# Altium PCB Misko 3.PcbDoc (part 4 of 4)
Units mm, origin at the board's own origin, x right, y up, seen from the top; angles counter-clockwise.
Board outline 128.1 x 53.3 mm, 6 copper layers (Top (LS), Mid 1 (LS), Mid 2 (GND), Mid 3 (P/HS), Mid 4 (GND), Bottom (HS)), stack 1.597 mm thick; 230 components, 214 nets, 896 pads, 500 vias.
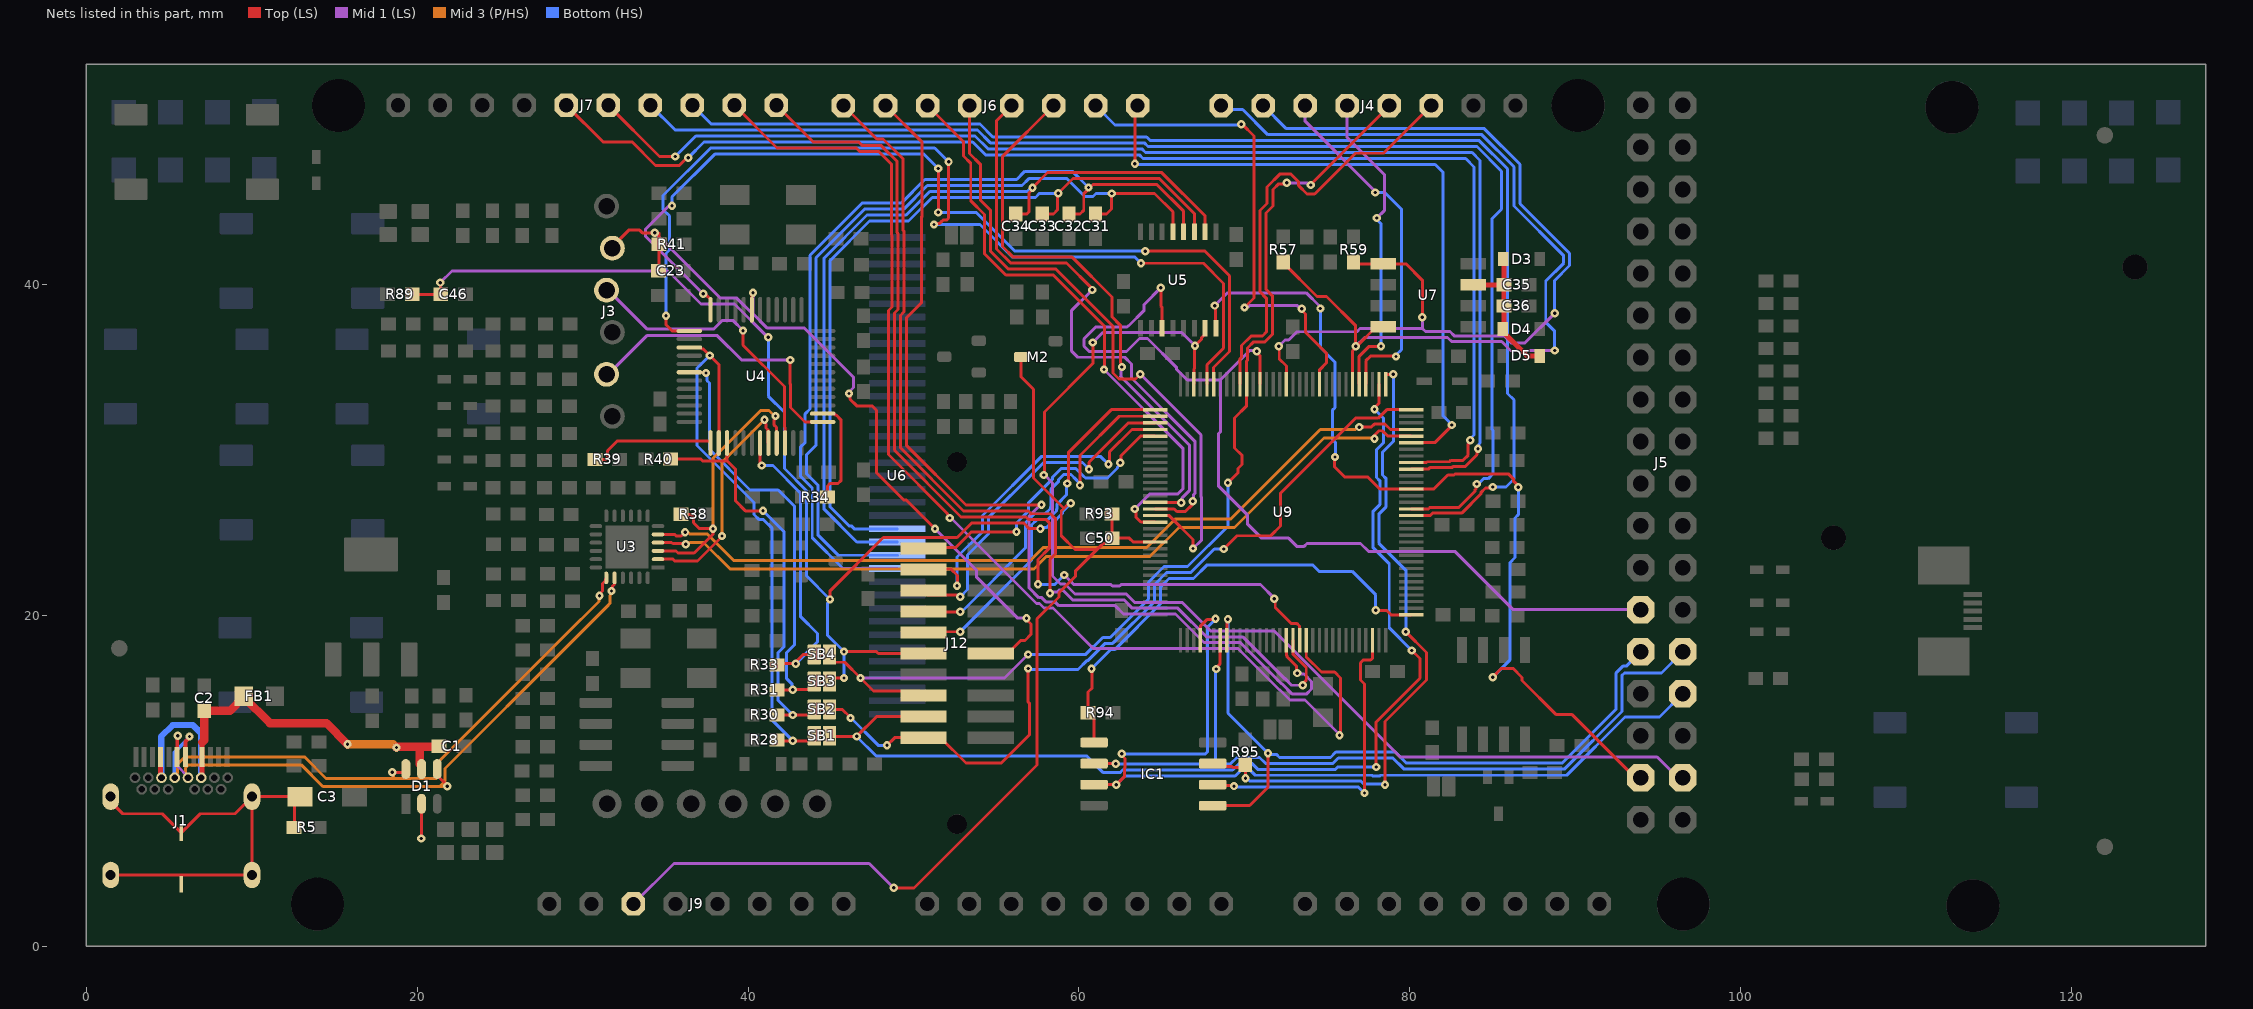
[diagram p8: the nets of this part, all layers, seen from the top]

## Via types
v1: diameter 0.5, hole 0.2, Top (LS) to Bottom (HS), tented both sides, 500 vias

## Nets (pads, with @x,y where several pads share a name; then routed paths per layer and width w, separated by ;. In a path a pad name is that pad's centre, name@x,y a point inside that pad or via, vN(x,y) a via of type N, cw(c..) or ccw(c..) an arc to the next point about the centre after c; other vN are vias at no path point) (continued)
NRST: C46.2 C50.2 J9.3 J12.10 M2.3 R31.2 R89.1 R93.2 SB3.1 SB3.2 U4.18 U9.21 | length 161
  Top (LS) w0.18: R89.1@19.702,39.393 C46.2@21.429,39.393 21.4,39.422 v1(21.4,40.1) ; R31.2@41.739,15.48 41.749,15.49 v1(42.7,15.49) 42.716,15.507 43.695,15.507 43.805,15.617 SB3.1@43.805,15.993 ; SB3.1@44.005,15.993 SB3.2@44.925,15.993 ; v1(44.958,20.955) 44.965,20.962 44.965,21.479 48.176,24.69 52.638,24.69 53.53,25.582 56.649,25.582 57,25.23 v1(57.668,25.23) ; SB3.2@45.125,16.09 45.235,16.2 v1(45.8,16.2) ; v1(45.8,17.8) 47.75,17.8 47.87,17.68 J12.10@50.6,17.68 ; v1(48.8,3.52) 50.034,3.52 57.465,10.951 57.465,19.778 58.793,21.105 58.793,21.352 59.779,22.338 59.779,22.655 61.468,24.345 61.697,24.345 C50.2@62.007,24.655 ; M2.3@56.494,35.602 56.494,34.409 57.25,33.653 57.25,28.294 59.089,26.455 ; v1(59.502,26.762) 59.415,26.762 59.281,26.628 59.261,26.628 59.089,26.455 ; 61.077,23.965 59.759,23.965 58.928,24.795 58.928,26.295 59.089,26.455 ; R93.2@61.987,26.123 61.987,24.675 C50.2@62.007,24.655 ; U9.21@64.598,24.423 63.275,24.423 63.043,24.655 C50.2@62.007,24.655
  Top (LS) w0.2: U4.18@36.456,34.682 36.466,34.673 37.423,34.673 v1(37.46,34.636)
  Mid 1 (LS) w0.18: v1(21.4,40.1) 22.105,40.805 35.159,40.805 37.153,38.81 39.178,38.81 41.194,36.795 v1(41.222,36.795) ; J9.3@33.074,2.554 35.521,5 47.32,5 v1(48.8,3.52)
  Bottom (HS) w0.18: v1(37.46,34.636) 37.521,34.575 37.521,34.171 37.666,34.026 37.666,30.023 40.123,27.566 41.819,27.566 42.8,26.585 42.8,18.211 42.335,17.746 42.335,16.165 42.667,15.833 42.667,15.523 v1(42.7,15.49) ; v1(41.222,36.795) 41.222,33.238 42.2,32.26 42.2,28.859 43.52,27.538 43.52,22.393 v1(44.958,20.955) ; v1@44.958,20.868 44.79,20.7 44.79,18.81 v1(45.8,17.8) v1(45.8,16.2) ; v1(57.668,25.23) 57.729,25.292 58.031,25.292 58.15,25.41 58.256,25.41 58.994,26.148 58.994,26.255 v1(59.502,26.762)
PWM2: J6.3 U9.15 | length 33.7
  Top (LS) w0.18: J6.3@58.466,50.8 55.369,47.703 55.369,42.677 55.38,42.667 55.38,42.284 56.024,41.64 59.587,41.64 61.997,39.229 61.997,38.031 62.5,37.528 62.5,35.26 62.533,35.228 62.533,35.056 v1(62.594,34.995) ; U9.15@64.598,26.823 v1@65.955,26.823
  Mid 1 (LS) w0.18: v1(62.594,34.995) 62.548,34.949 62.548,34.475 62.513,34.44 66.669,30.284 66.669,27.526 66.239,27.096 66.239,26.861 v1(66.178,26.8)
PWM3: J6.4 U9.16 | length 36.7
  Top (LS) w0.18: J6.4@55.926,50.8 55.009,49.883 55.009,43.538 55.009,42.528 55.02,42.517 55.02,42.135 55.875,41.28 56.758,41.28 59.243,41.28 60.794,39.729 v1(60.794,39.66) ; U9.16@64.598,26.423 65.753,26.423 65.916,26.26 66.424,26.26 66.839,26.675 66.839,26.856 v1(66.872,26.89)
  Mid 1 (LS) w0.18: v1(60.794,39.66) 59.562,38.427 59.562,35.954 59.926,35.589 62.763,35.589 63.171,35.182 63.171,34.338 67.019,30.489 67.019,27.381 66.933,27.295 66.933,26.951 v1(66.872,26.89)
PWM4: J6.5 U9.17 | length 39.1
  Top (LS) w0.18: J6.5@53.386,50.8 53.386,47.903 54.034,47.254 54.034,45.09 54.649,44.475 54.649,43.389 54.649,42.379 54.66,42.368 54.66,41.986 55.726,40.92 56.609,40.92 58.599,40.92 62.054,37.465 62.054,34.643 62.423,34.273 63.422,34.273 v1(63.711,34.561) ; U9.17@64.598,26.023 64.608,26.013 65.455,26.013 66.889,24.579 v1(66.889,24.025)
  Mid 1 (LS) w0.18: v1(63.711,34.561) 67.369,30.903 67.369,27.156 67.406,27.12 67.406,27.102 67.412,27.096 67.412,24.549 v1(66.889,24.025)
PWM5: J6.6 U9.18 | length 36.5
  Top (LS) w0.18: J6.6@50.846,50.8 53.026,48.62 53.026,47.754 53.459,47.321 53.459,45.041 54.289,44.211 54.289,43.24 54.289,42.23 54.3,42.219 54.3,41.836 55.576,40.56 56.46,40.56 58.45,40.56 61.54,37.47 61.54,34.877 v1(61.514,34.851) ; v1(63.373,26.416) 63.434,26.355 63.434,25.939 63.74,25.633 64.588,25.633 U9.18@64.598,25.623
  Mid 1 (LS) w0.18: v1(61.514,34.851) 66.3,30.065 66.3,28.099 66.3,27.651 65.984,27.335 64.292,27.335 v1(63.373,26.416)
PWM6: J6.7 U9.49 | length 60.5
  Top (LS) w0.18: J6.7@48.306,50.8 50.498,48.608 50.498,44.08 50.47,44.052 50.47,38.872 49.566,37.968 49.566,30.269 53.173,26.662 57.726,26.662 v1(57.734,26.67) ; U9.49@72.536,18.485 72.546,18.475 72.546,17.57 72.586,17.53 72.586,17.478 73.134,16.93 73.134,16.561 v1(73.195,16.5)
  Mid 1 (LS) w0.18: v1(57.734,26.67) 57.67,26.67 56.989,25.989 56.989,21.645 57.572,21.062 57.756,21.062 58.029,20.789 58.567,20.789 58.779,20.578 62.186,20.578 62.688,20.076 65.828,20.076 67.561,18.343 69.75,18.343 72.259,15.834 72.287,15.834 72.895,15.226 73.74,15.226 74.056,15.542 74.056,15.99 73.607,16.439 73.256,16.439 v1(73.195,16.5)
PWM7: J6.8 U9.50 | length 59.2
  Top (LS) w0.18: J6.8@45.766,50.8 47.785,48.781 48.161,48.781 49.375,47.567 49.375,43.265 49.415,43.225 49.415,38.326 49.206,38.117 49.206,30.12 53.024,26.302 56.947,26.302 57.119,26.13 58.28,26.13 58.568,25.843 58.568,23.692 58.253,23.377 v1(58.253,21.329) ; U9.50@72.936,18.485 72.946,18.475 72.946,17.679 72.946,17.627 73.735,16.838 73.735,16.072 73.516,15.853 v1(73.516,15.766)
  Mid 1 (LS) w0.18: v1(58.253,21.329) 58.314,21.39 58.677,21.39 58.824,21.537 59.004,21.537 59.614,20.928 62.714,20.928 63.216,20.426 65.973,20.426 67.706,18.693 69.895,18.693 72.404,16.184 72.432,16.184 72.85,15.766 v1(73.516,15.766)
PWM8: J7.1 U9.51 | length 60
  Top (LS) w0.18: J7.1@41.714,50.82 43.934,48.6 46.692,48.6 46.915,48.376 48.057,48.376 49.015,47.418 49.015,43.116 49.055,43.076 49.055,38.475 48.846,38.266 48.846,29.971 52.875,25.942 56.798,25.942 56.969,25.77 58.024,25.77 58.208,25.586 58.208,24.042 57.529,23.362 v1(57.529,21.869) ; v1(71.8,20.988) 71.861,20.927 71.861,20.464 72.813,19.513 73.156,19.513 73.326,19.343 73.326,18.495 U9.51@73.336,18.485
  Mid 1 (LS) w0.18: v1(59.105,22.427) 59.676,21.856 61.929,21.856 62.012,21.772 62.459,21.772 62.543,21.856 70.973,21.856 71.8,21.029 v1(71.8,20.988)
  Bottom (HS) w0.18: v1(57.529,21.869) 58.547,21.869 v1(59.105,22.427)
PWM9: J7.2 U9.52 | length 70.1
  Top (LS) w0.18: J7.2@39.174,50.82 41.754,48.24 46.542,48.24 46.766,48.016 47.908,48.016 48.655,47.269 48.655,42.967 48.695,42.927 48.695,38.625 48.486,38.415 48.486,29.709 52.043,26.151 52.043,26.096 52.184,25.956 v1(52.184,25.869) ; U9.52@73.736,18.485 73.736,17.477 74.653,16.56 75.45,16.56 75.8,16.21 75.8,12.8 v1(75.75,12.75)
  Mid 1 (LS) w0.18: v1(52.184,25.869) 52.27,25.869 57.427,20.712 57.611,20.712 57.884,20.439 58.422,20.439 60.868,17.993 69.605,17.993 72.114,15.484 72.142,15.484 72.75,14.876 73.666,14.876 75.75,12.792 v1(75.75,12.75)
PWM10: J7.3 U9.80 | length 76.9
  Top (LS) w0.18: U9.80@80.074,26.023 81.23,26.023 81.37,26.163 83.128,26.163 84.284,27.318 84.284,27.406 84.567,27.689 84.939,27.689 v1(85,27.75)
  Bottom (HS) w0.18: J7.3@36.634,50.82 37.774,49.68 54.02,49.68 54.794,48.906 64.094,48.906 64.32,48.68 84.197,48.68 85.9,46.977 85.9,33.402 86.287,33.015 86.287,28.237 85.8,27.75 v1(85,27.75)
PWM11: J7.4 U9.81 | length 77.7
  Top (LS) w0.18: U9.81@80.074,26.423 81.121,26.423 81.221,26.523 82.97,26.523 83.924,27.476 83.924,27.555 83.996,27.627 83.996,27.882 v1(84.042,27.928)
  Bottom (HS) w0.18: J7.4@34.094,50.82 35.594,49.32 53.871,49.32 54.644,48.546 63.945,48.546 64.171,48.32 84.048,48.32 85.54,46.828 85.54,44.54 84.96,43.96 84.96,31.236 85.02,31.176 85.02,28.534 84.733,28.247 84.448,28.247 84.129,27.928 v1(84.042,27.928)
PWM12: J7.5 U9.87 | length 77.3
  Top (LS) w0.18: J7.5@31.554,50.82 34.654,47.72 v1(35.6,47.72) ; U9.87@80.074,28.823 81.115,28.823 81.205,28.913 82.536,28.913 82.623,29 83.358,29 84.059,29.701 84.059,29.997 v1(84.12,30.058)
  Bottom (HS) w0.18: v1(35.6,47.72) 36.84,48.96 53.722,48.96 54.495,48.186 63.796,48.186 64.022,47.96 83.766,47.96 84.24,47.486 84.24,30.403 84.181,30.344 84.181,30.119 v1(84.12,30.058)
PWM13: J7.6 U9.88 | length 78.8
  Top (LS) w0.18: J7.6@29.014,50.82 31.228,48.606 32.98,48.606 34.406,47.18 35.842,47.18 36.308,47.646 v1(36.382,47.646) ; U9.88@80.074,29.223 81.006,29.223 81.056,29.273 82.387,29.273 82.474,29.36 83.208,29.36 83.52,29.671 83.52,30.36 83.647,30.487 v1(83.647,30.574)
  Bottom (HS) w0.18: v1(36.382,47.646) 37.336,48.6 53.572,48.6 54.346,47.826 63.646,47.826 63.873,47.6 83.371,47.6 83.88,47.091 83.88,30.893 83.647,30.66 v1(83.647,30.574)
QSPI.CLK: IC1.6 U9.62 | length 19.3
  Top (LS) w0.18: IC1.6@68.084,9.765 68.131,9.718 69.322,9.718 v1(69.369,9.671) ; v1(77.25,9.25) 77.25,15.84 77.01,16.08 77.01,17.12 77.18,17.29 77.63,17.29 77.736,17.395 U9.62@77.736,18.485
  Bottom (HS) w0.18: v1(69.369,9.671) 69.456,9.671 69.52,9.607 76.893,9.607 v1(77.25,9.25)
QSPI.NCS: IC1.1 R94.1 U9.65 | length 29.1
  Top (LS) w0.18: v1(60.754,16.763) 60.8,16.717 60.8,15.603 60.55,15.353 R94.1@60.55,14.1 60.6,14.1 60.91,13.79 60.91,12.308 IC1.1@60.914,12.305 ; v1(77.93,20.295) 78.586,20.295 78.857,20.023 U9.65@80.074,20.023
  Bottom (HS) w0.18: v1(60.754,16.763) 61.931,17.939 62.185,17.939 64.916,20.67 64.916,21.689 65.444,22.216 66.923,22.216 67.752,23.045 74.109,23.045 74.502,22.652 76.512,22.652 77.93,21.233 v1(77.93,20.295)
QSPI_IO0: IC1.5 J5.27 U9.40 | length 43.3
  Top (LS) w0.18: IC1.5@68.084,8.495 70.313,8.495 71.423,9.604 v1(71.423,11.655) ; U9.40@68.936,18.485 68.946,18.495 68.946,19.696 v1(69,19.75)
  Bottom (HS) w0.18: v1(69,19.75) 69,14.078 v1(71.423,11.655) 71.43,11.655 71.491,11.594 71.93,11.594 72.116,11.407 75.198,11.407 75.521,11.73 79.116,11.73 79.774,11.072 89.209,11.072 92.464,14.327 92.464,16.519 92.864,16.919 93.079,16.919 J5.27@93.952,17.793
QSPI_IO1: IC1.2 J5.28 U9.39 | length 48.2
  Top (LS) w0.18: IC1.2@60.914,11.035 60.921,11.028 62.217,11.028 v1(62.223,11.021) ; v1(68.299,16.748) 68.299,16.835 68.536,17.072 U9.39@68.536,18.485
  Bottom (HS) w0.18: v1(62.223,11.021) 62.244,11 68.101,11 ; v1(68.299,16.748) 68.25,16.7 68.25,11.149 68.101,11 ; J5.28@96.492,17.793 95.209,16.51 92.964,16.51 92.824,16.37 92.824,14.178 89.358,10.712 79.625,10.712 78.967,11.37 75.67,11.37 75.347,11.047 71.267,11.047 70.907,11.407 69.547,11.407 69.14,11 68.101,11
QSPI_IO2: IC1.3 J5.30 U9.36 | length 56.1
  Top (LS) w0.18: IC1.3@60.914,9.765 60.921,9.757 62.243,9.757 v1(62.25,9.75) 62.764,10.264 62.764,10.764 62.784,10.784 62.784,11.334 62.585,11.534 v1(62.585,11.62) ; U9.36@67.336,18.485 67.336,19.333 67.753,19.75 68.21,19.75 v1(68.25,19.79)
  Mid 1 (LS) w0.18: 68,19.75 68.21,19.75 v1(68.25,19.79)
  Bottom (HS) w0.18: v1(62.25,9.75) 62.78,10.28 69.439,10.28 69.846,10.687 70.293,10.687 70.653,10.327 77.699,10.327 77.736,10.29 78.184,10.29 78.221,10.327 89.482,10.327 92.996,13.841 95.08,13.841 J5.30@96.492,15.253 ; v1(62.585,11.62) 67.653,11.62 67.759,11.726 67.759,19.259 68.25,19.75 v1(68.25,19.79)
QSPI_IO3: IC1.7 R95.2 U9.97 | length 40.1
  Top (LS) w0.18: IC1.7@68.084,11.035 68.257,10.861 69.239,10.861 69.3,10.8 R95.2@69.889,10.8 ; R95.2@70.049,10.96 R95.2@69.889,10.8 ; v1(70.069,10.147) 70.069,10.62 R95.2@69.889,10.8 ; v1(78.5,9.75) 78.5,13.578 81,16.078 81,17.75 v1(79.75,19) ; U9.97@78.536,33.961 78.536,34.544 78.546,34.554 v1(78.995,34.554)
  Bottom (HS) w0.18: v1(70.069,10.147) 70.156,10.147 70.336,9.967 77.042,9.967 77.219,9.79 78.46,9.79 v1(78.5,9.75) ; v1(78.995,34.554) 78.995,30.501 78.347,29.853 78.347,28.475 78.541,28.28 78.541,26.527 78.12,26.106 78.12,24.353 79.75,22.723 v1(79.75,19)
SCK: J5.33 U5.16 U9.84 | length 55.3
  Top (LS) w0.18: v1(68.2,38.71) 68.237,38.673 68.237,37.37 U5.16@68.275,37.332 ; v1(75.472,29.558) 75.44,29.526 75.44,28.965 76.045,28.36 77.444,28.36 78.18,27.623 U9.84@80.074,27.623 81.443,27.623 82.293,28.474 82.67,28.474 82.721,28.525 85.975,28.525 86.249,28.251 86.249,28.123 86.55,27.823 v1(86.55,27.736) ; v1(85,16.25) 85.54,16.79 86.224,16.79 86.78,16.234 86.78,16.049 88.819,14.01 89.78,14.01 91.71,12.08 92.08,11.71 93.618,10.173 J5.33@93.952,10.173
  Mid 1 (LS) w0.18: v1(68.2,38.71) 68.975,39.485 73.729,39.485 74.529,38.685 74.529,38.591 v1(74.59,38.53)
  Bottom (HS) w0.18: v1(74.59,38.53) 74.59,36.173 75.459,35.305 75.459,34.623 75.473,34.61 75.473,32.542 75.313,32.382 75.313,30.631 75.493,30.451 75.493,29.579 v1(75.472,29.558) ; v1(85,16.25) 86.061,17.311 86.061,23.191 86.35,23.48 86.35,25.873 86.55,26.072 v1(86.55,27.736)
SHLD: C3.2 D1.2 J1.Shell R5.1 | length 31.4
  Top (LS) w0.18: J1.Shell@1.48,4.3 J1.Shell@10.02,4.3 J1.Shell@10.02,8.952 ; J1.Shell@1.48,9.03 1.48,8.73 2.21,8 4.6,8 J1.Shell@5.75,6.85 6.9,8 8.99,8 9.563,8.573 9.641,8.573 J1.Shell@10.02,8.952 ; R5.1@12.569,7.173 12.6,7.204 12.6,8.711 12.828,8.939 C3.2@12.479,9.289 ; C3.2@12.919,9.03 12.66,9.289 C3.2@12.479,9.289 ; v1(20.25,6.5) 20.259,6.509 20.259,7.371 20.269,7.38 D1.2@20.269,8.603 ; J1.Shell@10.02,8.952 J1.Shell@10.02,9.03 12.259,9.03 12.479,9.25 C3.2@12.479,9.289
STM_JRST: C23.2 J3.2 J12.9 R41.2 U4.7 | length 47.8
  Top (LS) w0.18: J3.2@31.7,42.18 32.79,43.27 33.449,43.27 33.609,43.11 v1(34.355,43.11) 34.382,43.084 34.628,43.084 34.628,40.867 C23.2@34.578,40.817 ; U4.7@40.231,38.457 40.245,38.471 40.245,39.437 v1(40.296,39.488) ; v1(46.1,33.4) 46.161,33.339 46.161,33.057 46.563,32.655 47.49,32.655 47.766,32.379 47.766,28.606 49.423,26.949 49.577,26.949 v1(51.296,25.23) ; J12.9@54.665,17.68 55.692,17.68 56.481,18.468 56.732,18.468 57.105,18.841 57.105,19.464 56.834,19.735 v1(56.834,19.822)
  Mid 1 (LS) w0.18: v1(34.355,43.11) 34.381,43.11 38.331,39.16 39.323,39.16 40.268,38.215 40.296,38.215 ; v1(40.296,39.488) 40.296,38.215 ; v1(46.1,33.4) 46.1,33.487 46.38,33.766 46.38,34.382 43.416,37.346 41.165,37.346 40.296,38.215 ; v1(51.296,25.23) 53.795,22.73 53.795,22.322 56.295,19.822 v1(56.834,19.822)
STM_JTCK_5: J3.5 U4.37 | length 17.8
  Top (LS) w0.18: v1(42.547,35.424) 42.547,33.981 42.56,33.968 42.56,32.559 43.436,31.682 U4.37@44.506,31.682
  Mid 1 (LS) w0.18: J3.5@31.548,34.56 33.884,36.896 38.144,36.896 39.617,35.424 v1(42.547,35.424)
STM_JTMS_5: J3.3 U4.34 | length 17.4
  Top (LS) w0.18: v1(39.7,37.2) 39.7,36.318 42.2,33.819 42.2,31.388 42.231,31.357 U4.34@42.231,30.407
  Mid 1 (LS) w0.18: J3.3@31.548,39.64 33.88,37.307 37.944,37.307 38.459,37.822 39.077,37.822 v1(39.7,37.2)
T_JTCK: J12.4 R28.2 SB1.1 SB1.2 U4.15 U4.26 U9.98 | length 101.4
  Top (LS) w0.18: U4.15@36.456,36.182 37.125,36.182 37.21,36.097 37.278,36.097 v1(37.681,35.694) 38.231,35.144 U4.26@38.231,30.407 ; R28.2@41.739,12.459 41.789,12.408 43.695,12.408 43.805,12.518 SB1.1@43.805,12.714 ; SB1.1@44.005,12.714 SB1.2@44.925,12.714 44.964,12.675 v1(46.561,12.675) ; v1@46.6,12.714 47.756,13.87 J12.4@50.6,13.87 ; v1(77.863,32.448) 77.863,32.535 78.136,32.808 U9.98@78.136,33.961 ; v1(77.96,10.83) 77.96,13.547 80.609,16.195 80.609,17.378 v1(80.118,17.868)
  Bottom (HS) w0.18: v1(37.681,35.694) 37.091,35.105 36.92,34.933 36.92,30.26 40.366,26.814 40.366,26.088 40.683,25.771 40.937,25.771 41.457,25.251 41.457,13.651 v1(42.7,12.408) ; v1(46.561,12.675) 47.736,11.5 60.448,11.5 61.467,10.481 62.472,10.481 62.631,10.64 69.29,10.64 69.697,11.047 70.442,11.047 70.802,10.687 75.496,10.687 75.639,10.83 v1(77.96,10.83) ; v1(77.863,32.448) 78.403,31.908 78.403,30.418 77.987,30.002 77.987,28.326 78.181,28.131 78.181,26.677 77.76,26.255 77.76,24.102 78.751,23.11 78.751,19.235 v1(80.118,17.868)
T_JTMS: J12.2 R30.2 R40.2 SB2.1 SB2.2 U4.27 U9.96 | length 75.5
  Top (LS) w0.18: R40.2@35.324,29.437 37.147,29.437 37.259,29.325 38.722,29.325 ; U4.27@38.731,30.407 38.722,30.398 38.722,29.332 39.249,28.805 39.249,26.9 39.838,26.311 v1(40.906,26.311) ; R30.2@41.739,13.969 43.695,13.969 43.805,14.079 SB2.1@43.805,14.311 ; SB2.1@44.005,14.311 SB2.2@44.925,14.311 ; SB2.2@45.125,14.311 45.136,14.3 45.7,14.3 46.186,13.814 v1(46.186,13.786) ; v1(48.4,12.135) 48.865,12.6 51.627,12.6 53.167,11.06 55.303,11.06 57,12.757 57,14.685 56.925,14.76 v1(56.925,16.775) ; v1(68.75,24) 69.551,24.801 71.59,24.801 72.181,25.392 72.181,27.372 76.496,31.687 76.496,31.694 76.709,31.908 78.086,31.908 78.601,32.423 U9.96@80.074,32.423
  Bottom (HS) w0.18: v1(40.906,26.311) 42.17,25.048 42.17,18.09 41.817,17.737 41.817,14.853 v1(42.7,13.969) ; v1(46.186,13.786) 46.214,13.786 47.865,12.135 v1(48.4,12.135) ; v1(56.925,16.775) 56.983,16.717 59.945,16.717 60.501,17.274 60.562,17.274 61.588,18.299 62.036,18.299 64.556,20.82 64.556,21.838 65.295,22.576 66.758,22.576 68.182,24 v1(68.75,24)
T_SWDIO_IN_5: R39.1 U4.25 | length 7.8
  Top (LS) w0.18: R39.1@30.74,29.417 31.394,29.417 31.5,29.523 31.5,29.937 32.09,30.528 37.699,30.528 37.699,30.44 U4.25@37.731,30.407
T_SWO: J4.4 J12.6 R33.2 SB4.1 SB4.2 U4.31 U9.118 | length 83.7
  Top (LS) w0.18: U4.31@40.731,30.407 40.731,29.222 40.822,29.131 v1(40.822,29.044) ; R33.2@41.739,16.991 41.817,17.069 v1(42.875,17.069) 42.936,17.13 42.936,17.229 43.335,17.628 44.004,17.628 SB4.1@44.005,17.626 SB4.2@44.925,17.626 ; SB4.2@45.125,17.266 45.235,17.156 45.844,17.156 v1(46.8,16.2) ; 47,16 47.58,15.42 50.32,15.42 J12.6@50.6,15.14 ; v1(69,28) 69.608,28.608 69.608,28.872 69.849,29.114 69.849,29.668 69.405,30.112 69.405,31.924 70.136,32.654 U9.118@70.136,33.961 70.136,35.353 70.18,35.398 70.18,36.143 70.556,36.519 71.242,36.519 71.685,36.962 71.685,39.306 71.297,39.694 71.297,44.306 71.72,44.729 71.72,45.724 72.067,46.071 72.5,46.071 v1(72.561,46.132) ; v1(74,46) 74,46.024 78.751,50.776 J4.4@78.751,50.8
  Mid 1 (LS) w0.18: v1(46.8,16.2) 55.5,16.2 v1(56.925,17.625) ; v1(72.561,46.132) 73.782,46.132 73.913,46 v1(74,46)
  Bottom (HS) w0.18: v1(40.822,29.044) 41.505,29.044 43.16,27.389 43.16,19.935 44.195,18.9 44.195,18.388 v1(42.875,17.069) ; v1(56.925,17.625) 56.934,17.634 60.413,17.634 61.439,18.659 61.887,18.659 64.196,20.969 64.196,21.987 65.145,22.936 66.563,22.936 69,25.373 v1(69,28)
TCH_CS: J5.34 U5.15 U9.126 | length 69.1
  Top (LS) w0.18: v1(57.873,28.467) 57.913,28.507 57.913,32.283 60.839,35.209 v1(60.839,36.479) ; U9.126@66.936,33.961 66.946,33.971 66.946,34.872 66.986,34.912 66.986,36.254 67.417,36.685 67.417,36.782 67.625,36.989 U5.15@67.625,37.332
  Mid 1 (LS) w0.18: v1(57.873,28.467) 57.936,28.467 58.406,27.997 58.406,22.362 58.881,21.887 59.149,21.887 59.759,21.278 62.859,21.278 63.36,20.776 66.224,20.776 67.957,19.043 71.798,19.043 79.408,11.432 94.941,11.432 96.2,10.173 J5.34@96.492,10.173 ; v1(60.839,36.479) 61.439,37.079 66.206,37.079 v1(67.009,36.277)
TCH_PENIRQ: J5.25 U5.11 U9.116 | length 59.5
  Top (LS) w0.18: v1(64.948,39.79) 64.948,38.678 65.025,38.601 65.025,37.409 64.986,37.371 U5.11@65.025,37.332 ; v1(70.751,35.951) 70.751,35.864 70.936,35.68 U9.116@70.936,33.961
  Mid 1 (LS) w0.18: v1(64.948,39.79) 63.941,38.783 63.941,38.426 62.995,37.48 62.956,37.48 62.905,37.429 61.025,37.429 60.299,36.703 60.299,36.256 60.615,35.939 62.874,35.939 63.664,36.729 64.135,36.729 65.879,34.985 65.879,34.886 66.55,34.215 68.544,34.215 ; v1(70.751,35.951) 70.694,36.008 70.337,36.008 68.544,34.215 ; J5.25@93.952,20.333 86.238,20.333 82.711,23.86 77.493,23.86 77.013,24.34 73.783,24.34 73.607,24.164 73.159,24.164 72.671,24.652 71.041,24.652 70.17,25.523 70.17,26.066 68.419,27.817 68.419,30.954 68.544,31.078 68.544,34.215
TRACE.CLK: J12.12 U9.1 | length 22.5
  Top (LS) w0.18: J12.12@50.6,18.95 50.65,19 v1(52.818,19) ; v1(59.296,27.962) 59.358,28.023 59.358,28.468 59.358,29.823 61.957,32.423 U9.1@64.598,32.423
  Bottom (HS) w0.18: v1(52.818,19) 57.132,23.314 57.132,24.985 57.128,24.988 57.128,25.454 57.444,25.77 58.107,25.77 58.634,26.298 58.634,26.404 58.679,26.449 58.679,26.71 59.235,27.266 59.235,27.901 v1(59.296,27.962)
TRACE.TR0: J12.14 U9.2 | length 22.2
  Top (LS) w0.18: J12.14@50.6,20.22 50.62,20.2 v1(52.818,20.2) ; v1(60.055,27.861) 60.055,29.645 62.433,32.023 U9.2@64.598,32.023
  Bottom (HS) w0.18: v1(52.818,20.2) 52.9,20.2 56.772,24.072 56.772,24.835 56.768,24.839 56.768,25.603 57.295,26.13 57.958,26.13 58.274,26.447 58.274,26.553 58.319,26.598 58.319,27.641 58.773,28.095 58.773,28.202 59.073,28.502 59.52,28.502 59.836,28.186 59.836,28.166 60.055,27.947 v1(60.055,27.861)
TRACE.TR1: J12.16 U9.3 | length 20.9
  Top (LS) w0.18: J12.16@50.6,21.49 50.88,21.21 52.628,21.21 52.731,21.107 v1(52.818,21.107) ; v1(60.611,28.826) 60.611,29.237 62.996,31.623 U9.3@64.598,31.623
  Bottom (HS) w0.18: v1(52.818,21.107) 53.268,21.557 53.268,23.644 54.524,24.9 54.524,25.882 57.333,28.691 57.864,29.222 60.215,29.222 v1(60.611,28.826)
TRACE.TR2: J12.18 U9.4 | length 21.1
  Top (LS) w0.18: J12.18@50.6,22.76 50.618,22.778 52.268,22.778 52.653,22.392 52.653,21.803 v1(52.632,21.782) ; v1(61.789,29.115) 61.85,29.176 61.85,29.872 63.201,31.223 U9.4@64.598,31.223
  Bottom (HS) w0.18: v1(52.632,21.782) 52.632,23.517 54.164,25.049 54.164,26.031 57.715,29.582 61.321,29.582 v1(61.789,29.115)
TRACE.TR3: J12.20 U9.5 | length 18.3
  Top (LS) w0.18: J12.20@50.6,24.03 50.647,24.077 52.535,24.077 53.499,25.042 v1(56.228,25.042) ; v1(62.49,29.212) 62.551,29.273 62.551,29.645 63.729,30.823 U9.5@64.598,30.823
  Bottom (HS) w0.18: v1(56.228,25.042) 56.228,25.572 56.935,26.279 56.935,26.766 58.413,28.244 58.413,28.351 58.923,28.862 59.811,28.862 60.273,28.401 60.279,28.401 60.393,28.286 61.724,28.286 62.329,28.891 62.329,28.964 62.49,29.125 v1(62.49,29.212)
UART4_RX: J4.5 U9.101 | length 19
  Top (LS) w0.18: U9.101@76.936,33.961 76.936,35.647 77.538,36.25 v1(78.25,36.25)
  Mid 1 (LS) w0.18: J4.5@76.211,50.8 76.211,48.872 78.45,46.633 78.45,44.45 v1(78,44)
  Bottom (HS) w0.18: v1(78,44) 78,43.913 78.25,43.663 v1(78.25,36.25)
UART4_TX: J4.6 U9.100 | length 21.4
  Top (LS) w0.18: U9.100@77.336,33.961 77.336,35.374 77.615,35.654 77.648,35.654 77.655,35.66 78.102,35.66 78.108,35.654 79.143,35.654 v1(79.162,35.634)
  Mid 1 (LS) w0.18: J4.6@73.671,50.8 73.671,49.846 77.91,45.607 v1(77.91,45.55)
  Bottom (HS) w0.18: v1(77.91,45.55) 78.473,45.55 79.487,44.535 79.487,36.044 79.162,35.719 v1(79.162,35.634)
USART1_RX: J6.1 U9.91 | length 40.8
  Top (LS) w0.18: v1(63.379,47.286) 63.379,50.633 J6.1@63.546,50.8 ; U9.91@80.074,30.423 81.503,30.423 82.522,31.442 v1(82.522,31.496)
  Bottom (HS) w0.18: v1(63.379,47.286) 63.426,47.24 81.529,47.24 81.997,46.771 81.997,35.319 82.01,35.306 82.01,32.039 82.522,31.527 v1(82.522,31.496)
USART1_TX: J6.2 U9.107 | length 29.9
  Top (LS) w0.18: v1(69.809,49.675) 69.86,49.675 70.577,48.958 70.577,39.172 v1(70,38.595) ; v1(73.469,38.515) 73.469,38.428 73.69,38.207 73.69,37.105 74.959,35.836 74.959,35.252 74.546,34.838 74.546,33.971 U9.107@74.536,33.961
  Mid 1 (LS) w0.18: v1(70,38.595) 70.061,38.657 70.281,38.657 70.326,38.702 73.195,38.702 73.382,38.515 v1(73.469,38.515)
  Bottom (HS) w0.18: J6.2@61.006,50.8 62.18,49.626 69.761,49.626 v1(69.809,49.675)
USART2_RX: J4.3 U9.119 | length 26.4
  Top (LS) w0.18: U9.119@69.736,33.961 69.736,35.5 69.82,35.584 69.82,36.292 70.407,36.879 71.093,36.879 71.325,37.111 71.325,39.157 70.937,39.545 70.937,44.455 71.36,44.878 71.36,45.873 72.159,46.672 72.785,46.672 73.281,46.176 73.281,45.956 73.776,45.46 74.248,45.46 76.706,47.919 78.41,47.919 J4.3@81.291,50.8
USART3_RX: U4.12 U9.123 | length 55.6
  Top (LS) w0.18: v1(37.297,39.43) 37.358,39.369 37.451,39.369 37.731,39.088 U4.12@37.731,38.457 ; v1(51.5,44.343) v1(51.5,47) ; v1(64,42) 67.612,42 69.1,40.512 69.1,35.933 68.136,34.969 U9.123@68.136,33.961
  Mid 1 (LS) w0.18: v1(35.406,44.748) 35.345,44.686 35.168,44.686 33.815,43.334 33.815,42.886 37.271,39.43 v1(37.297,39.43)
  Bottom (HS) w0.18: v1(35.406,44.748) 35.406,45.282 37.989,47.865 50.635,47.865 v1(51.5,47) ; v1(51.5,44.343) 53.794,44.343 56.138,42 v1(64,42)
USART3_TX: U4.13 U9.124 | length 58.3
  Top (LS) w0.18: v1(35.045,38.093) 35.045,37.548 35.411,37.182 U4.13@36.456,37.182 ; v1(51.238,43.613) 51.3,43.675 51.578,43.675 51.707,43.803 51.793,43.89 51.81,43.89 52.015,43.89 52.12,43.995 v1(52.12,47.4) ; v1(63.75,41.27) 67.519,41.27 68.74,40.049 68.74,36.135 67.736,35.13 U9.124@67.736,33.961
  Bottom (HS) w0.18: v1(35.045,38.093) 35.045,41.863 35.255,42.073 35.255,44.135 34.866,44.524 34.866,45.367 37.739,48.24 51.28,48.24 v1(52.12,47.4) ; v1(51.238,43.613) 54.015,43.613 55.989,41.64 63.38,41.64 v1(63.75,41.27)
USART5_RX: J4.7 R59.2 U7.1 U9.112 | length 55.8
  Top (LS) w0.18: v1(72.075,36.26) 72.104,36.232 72.104,35.486 72.536,35.054 U9.112@72.536,33.961 ; R59.2@76.597,41.347 76.709,41.234 U7.1@78.379,41.234 79.766,41.234 80.75,40.25 v1(80.75,38)
  Mid 1 (LS) w0.18: v1(72.075,36.26) 72.081,36.26 72.445,36.625 72.67,36.625 73.175,37.13 76.791,37.13 76.991,37.33 80.75,37.33 ; v1(80.75,38) 80.75,37.48 80.75,37.33 ; v1(88.75,38.25) 86.96,36.46 86.117,36.46 85.693,36.884 82.674,36.884 82.418,37.14 80.94,37.14 80.75,37.33
  Bottom (HS) w0.18: J4.7@71.131,50.8 72.531,49.4 84.496,49.4 86.65,47.246 86.65,44.873 89.65,41.873 89.65,41.127 88.75,40.227 v1(88.75,38.25)
USART5_TX: J4.8 R57.2 U7.4 U9.102 | length 56.6
  Top (LS) w0.18: R57.2@72.347,41.347 72.347,41.297 74.385,39.259 74.958,39.259 76.719,37.497 76.719,36.281 v1@76.75,36.25 ; U9.102@76.536,33.961 76.536,35.98 76.719,36.163 v1(76.719,36.25) v1@76.75,36.25 ; U7.4@78.379,37.424 77.954,37.424 76.78,36.25 v1@76.75,36.25
  Mid 1 (LS) w0.18: v1(76.719,36.25) 77.259,36.79 82.273,36.79 82.529,36.534 85.548,36.534 86.082,36 v1(88.75,36)
  Bottom (HS) w0.18: J4.8@68.591,50.8 68.831,50.56 69.894,50.56 71.414,49.04 84.346,49.04 86.29,47.097 86.29,44.724 89.29,41.724 89.29,41.276 88.21,40.196 88.21,37.706 88.75,37.165 v1(88.75,36)
USB2_N: U3.4 U9.92 | length 50.1
  Top (LS) w0.18: U3.4@34.557,24.382 34.568,24.394 34.871,24.394 34.876,24.399 35.38,24.399 35.454,24.326 36.209,24.326 v1(36.24,24.296) ; v1(77.863,30.668) 77.801,30.729 77.801,30.815 78.134,31.148 78.336,31.148 78.66,30.823 U9.92@80.074,30.823
  Mid 3 (P/HS) w0.18: v1(36.24,24.296) 36.301,24.357 36.465,24.357 36.505,24.397 37.31,24.397 38.918,22.79 57.274,22.79 58.044,23.56 64.296,23.56 66.042,25.306 69.403,25.306 74.804,30.707 77.824,30.707 v1(77.863,30.668)
USB2_P: U3.5 U9.93 | length 49.7
  Top (LS) w0.18: U3.5@34.557,24.882 34.568,24.871 34.871,24.871 34.876,24.866 35.574,24.866 35.647,24.792 35.961,24.792 v1@36.051,24.882 ; v1(76.933,31.368) 77.67,31.368 77.85,31.548 78.501,31.548 78.826,31.223 U9.93@80.074,31.223
  Mid 3 (P/HS) w0.18: v1(36.195,25.019) 36.256,24.958 36.42,24.958 36.46,24.917 37.526,24.917 39.133,23.31 57.059,23.31 57.828,24.08 64.081,24.08 65.827,25.826 69.187,25.826 74.588,31.227 76.705,31.227 76.846,31.368 v1(76.933,31.368)
USB_N: D1.6 J1.A7 J1.B7 U3.19 | length 39.1
  Top (LS) w0.18: v1(18.5,10.5) 19.154,10.5 19.319,10.664 D1.6@19.319,10.703 ; v1(31.02,21.18) 31.02,21.266 31.21,21.457 31.21,21.915 31.39,22.095 31.39,22.178 31.431,22.219 U3.19@31.431,22.257
  Top (LS) w0.22: J1.A7@6.002,11.454 6.002,12.36 6.238,12.596 v1(6.238,12.672)
  Mid 3 (P/HS) w0.18: J1.B7@5.336,10.188 5.336,10.293 5.51,10.467 5.51,10.974 5.974,11.438 13.195,11.438 14.5,10.133 18.622,10.133 ; v1(18.5,10.5) 18.561,10.439 18.561,10.194 18.622,10.133 ; v1(31.02,21.18) 30.992,21.152 30.992,20.832 28.898,18.739 21.193,11.034 21.193,10.168 21.159,10.133 18.622,10.133
  Bottom (HS) w0.22: J1.B7@5.336,10.188 5.336,11.723 6.238,12.625 v1(6.238,12.672)
USB_P: D1.4 J1.A6 J1.B6 U3.20 | length 39.3
  Top (LS) w0.18: D1.4@21.219,10.703 21.219,10.317 21.819,9.717 v1(21.819,9.664) ; v1@31.844,21.565 31.844,21.578 31.811,21.611 31.811,21.751 31.931,21.871 U3.20@31.931,22.257
  Top (LS) w0.22: J1.A6@5.5,11.43 5.502,11.432 5.502,12.65 5.487,12.666 v1(5.54,12.719)
  Mid 1 (LS) w0.16: v1(5.54,12.719) 5.54,10.846 6.136,10.25 J1.B6@6.136,10.188
  Mid 3 (P/HS) w0.18: J1.B6@6.136,10.188 6.136,10.321 5.99,10.467 5.99,10.775 6.173,10.958 12.996,10.958 14.301,9.653 18.622,9.653 21.368,9.653 ; v1(21.819,9.664) 21.808,9.653 21.368,9.653 ; v1(31.75,21.463) 31.689,21.402 31.689,21.233 31.653,21.198 31.653,20.717 31.549,20.613 31.549,20.601 29.129,18.182 21.681,10.734 21.681,9.966 21.368,9.653
USB_RENUM_5: R34.2 U4.38 | length 6.6
  Top (LS) w0.18: U4.38@44.506,32.182 45.175,32.182 45.26,32.097 45.328,32.097 45.61,31.816 45.61,28.126 45.44,27.956 44.941,27.956 44.798,27.812 R34.2@44.798,27.142
USB_STLINK_N: U3.2 U4.32 | length 14.2
  Top (LS) w0.18: U3.2@34.557,23.382 34.567,23.392 35.452,23.392 35.569,23.276 36.944,23.276 38.427,24.758 v1(38.427,24.786) ; v1(40.995,31.817) 41.056,31.755 41.056,31.573 41.078,31.551 41.078,31.318 41.218,31.178 41.218,30.421 U4.32@41.231,30.407
  Mid 3 (P/HS) w0.18: v1@38.434,24.793 38.434,29.256 v1(40.995,31.817)
USB_STLINK_P: R38.1 U3.3 U4.33 | length 17.2
  Top (LS) w0.18: U3.3@34.557,23.882 34.567,23.872 35.651,23.872 35.768,23.756 36.746,23.756 37.876,24.886 v1(37.877,25.226) v1(37.877,25.226) 37.06,25.226 36.699,25.588 36.699,25.943 36.566,26.076 35.97,26.076 R38.1@35.939,26.108 ; v1(41.66,32.037) 41.598,31.976 41.598,31.812 41.558,31.771 41.558,31.517 41.718,31.357 41.718,31.069 U4.33@41.731,31.055
  Mid 3 (P/HS) w0.18: v1(37.877,25.226) 37.877,29.487 40.764,32.374 41.261,32.374 41.598,32.037 v1(41.66,32.037)
V_BUS: C1.2 C2.2 D1.5 FB1.1 J1.A4 J1.A9 J1.B4 J1.B9 | length 30.8
  Top (LS) w0.25: J1.B4@6.95,10.18 J1.B4@7,10.23
  Top (LS) w0.3: J1.A4@4.5,11.43 4.5,10.23 J1.B9@4.55,10.18 ; J1.B4@7,10.23 7,12.316
  Top (LS) w0.5: 7,12.316 7.129,12.446 C2.2@7.129,14.223 8.691,14.223 FB1.1@9.518,15.05 ; FB1.1@9.518,15.1 FB1.1@9.518,15.05 ; v1(15.795,12.195) 14.518,13.473 11.096,13.473 FB1.1@9.518,15.05 ; v1(18.75,12) 18.8,12.05 20.161,12.05 ; D1.5@20.269,10.703 20.269,10.883 20.161,10.991 20.161,12.05 ; C1.2@21.459,12.05 20.161,12.05
  Mid 3 (P/HS) w0.5: v1(15.795,12.195) 18.555,12.195 v1(18.75,12)
  Bottom (HS) w0.381: J1.B9@4.536,10.188 4.536,12.674 5.221,13.359 6.457,13.359 6.936,12.88 J1.B4@6.936,10.188
VBAT_8: C35.2 C36.2 D3.1 D4.1 D5.2 U7.7 | length 9.4
  Top (LS) w0.3: U7.7@83.829,39.964 C35.2@85.67,39.964 ; C36.2@85.67,38.522 85.67,38.694 C35.2@85.67,39.964 ; C36.2@85.69,38.694 85.69,38.522 85.69,37.296 85.615,37.221 85.78,37.056 85.78,36.971 87.08,35.671 D5.2@87.845,35.671 ; D3.1@85.75,41.645 85.685,41.58 85.685,40.162 85.67,40.147 C35.2@85.67,39.964
XL_7: C32.2 U5.4 U6.12 | length 53
  Top (LS) w0.18: C32.2@59.391,44.25 60.061,44.25 60.288,44.476 60.288,45.476 60.531,45.719 v1@60.531,45.806 ; v1(60.575,45.85) 60.662,45.85 60.842,46.03 62.854,46.03 62.857,46.026 64.706,46.026 66.325,44.407 U5.4@66.325,43.168
  Bottom (HS) w0.18: U6.12@49.022,22.823 45.737,22.823 43.88,24.68 43.88,27.688 43.16,28.408 43.16,30.143 43.45,30.433 43.45,32.169 43.74,32.459 43.74,41.747 46.892,44.9 49.256,44.9 50.685,46.329 56.233,46.329 56.729,46.825 59.6,46.825 v1(60.575,45.85)
XR_7: C34.2 U5.2 U6.14 | length 50.1
  Top (LS) w0.18: C34.2@56.174,44.25 56.844,44.25 56.988,44.394 56.988,45.548 57.194,45.753 v1(57.194,45.84) ; v1@57.189,45.84 58.099,46.75 63.152,46.75 63.156,46.746 65.004,46.746 67.625,44.125 U5.2@67.625,43.168
  Bottom (HS) w0.18: U6.14@49.022,24.423 46.573,24.423 44.6,26.396 44.6,41.589 47.191,44.18 49.555,44.18 50.984,45.609 56.876,45.609 57.107,45.84 v1(57.194,45.84)
YD_7: C33.2 U5.3 U6.15 | length 47.6
  Top (LS) w0.18: C33.2@57.783,44.25 58.453,44.25 58.701,44.499 58.701,45.451 59.64,46.39 63.003,46.39 63.007,46.386 64.855,46.386 66.975,44.266 U5.3@66.975,43.168
  Bottom (HS) w0.18: U6.15@49.022,25.223 46.416,25.223 46.239,25.4 46.105,25.4 44.96,26.545 44.96,41.44 47.34,43.82 49.704,43.82 51.133,45.249 57.367,45.249 57.618,45.5 v1(58.75,45.5)
YU_7: C31.2 U5.5 U6.13 | length 50.4
  Top (LS) w0.18: C31.2@61,44.25 61.67,44.25 61.972,44.552 v1(61.972,45.49) 64.566,45.49 65.675,44.381 U5.5@65.675,43.168
  Bottom (HS) w0.18: U6.13@49.022,23.623 45.447,23.623 44.24,24.83 44.24,27.837 43.52,28.557 43.52,29.688 44.1,30.268 44.1,41.598 47.042,44.54 49.405,44.54 50.835,45.969 56.554,45.969 56.965,46.38 59.275,46.38 60.06,45.595 60.345,45.31 60.847,45.31 61.027,45.49 v1(61.972,45.49)
pads on no net: D1.1 D1.3 FID1.F FID2.F FID3.F J1.A2 J1.A3 J1.A8 J1.A10 J1.A11 J1.B2 J1.B3 J1.B8 J1.B10 J1.B11 J3.1 J9.1 J12. J12.7 J12.8 U2.5 U3.6 U3.11 U3.12 U4.4 U4.11 U4.14 U4.16 U4.17 U4.19 U4.21 U4.22 U4.28 U4.40 U4.41 U4.42 U4.43 U4.45 U4.46 U5.7 U5.8 U5.13 U7.3 U7.8 U9.6

## Polygon pours and split planes (outlines as drawn)
GND on Top (LS) "GND_L01_P047" (solid, remove dead copper, pour order 47): 0,53.176 128.1,53.176 128.1,-0.029 0,-0.123
SHLD on Top (LS) "SHLD_L01_P038" (solid, remove dead copper, pour order 38): 20.382,5.639 19.229,4.485 12.4,4.485 11.632,3.718 11.632,0 0,0 0,8.45 20.382,8.45
+3V3HUB on Top (LS) "+3V3HUB_L01_P037" (solid, pour order 37): 21.862,18.6 21.862,24.138 19.75,26.25 19.75,36.877 3.75,36.877 3.75,18.6
GND on Top (LS) "GND_L01_P035" (solid, pour order 35): 13.319,6.319 18.305,6.319 18.305,10.127 13.319,10.127
GND on Top (LS) "GND_L01_P034" (solid, pour order 34): 31.547,21.25 31.547,15.096 38.75,15.096 38.75,21.25 34.266,21.25 34.151,21.135 34.151,21.116 32.023,21.116 31.877,21.262 31.865,21.25
GND on Mid 4 (GND) "GND_L05_P041" (solid, remove dead copper, pour order 41): 0,53.218 0,0 128.1,0 128.1,53.3 0,53.3
SHLD on Mid 4 (GND) "SHLD_L05_P039" (solid, remove dead copper, pour order 39): 0,8.43 20.447,8.43 20.447,0 0,0
GND on Mid 3 (P/HS) "GND_L04_P045" (solid, remove dead copper, pour order 45): 0,53.3 128.127,53.3 128.127,0.094 0,0
+3V3 on Mid 3 (P/HS) "+3V3_L04_P042" (solid, remove dead copper, pour order 42): 44.887,47.389 92.5,47.389 92.55,4.5 28,4.5 28,47.389 31.2,47.389 31.9,47.389 32.624,47.389 36.943,47.389 36.966,47.366 44.887,47.366
+3V3HUB on Mid 3 (P/HS) "+3V3HUB_L04_P036" (solid, remove dead copper, pour order 36): 34.062,28.868 19.773,40.75 3.75,40.75 3.75,11.349 18.951,11.349 24.9,5.4 35.2,5.4 37.867,8.067 37.867,11.374 36.5,12.742 36.5,20.76 33.912,23.347
GND on Bottom (HS) "SS" (solid, remove dead copper, pour order 44): 0,53.3 128.127,53.3 128.127,0.094 0,0
+3V3HUB on Bottom (HS) "+3V3HUB_L06_P043" (solid, pour order 43): 3.75,29.6 21.862,29.6 21.862,17 3.75,17
GND on Mid 1 (LS) "GND_L02_P048" (solid, remove dead copper, pour order 48): 0,53.3 128.127,53.3 128.127,0.094 0,0
+3V3HUB on Mid 1 (LS) "+3V3HUB_L02_P046" (solid, pour order 46): 3.75,37.252 21.862,37.252 21.862,18.6 3.75,18.6
GND on Mid 2 (GND) "GND_L03_P040" (solid, remove dead copper, pour order 40): 0,53.3 0,0 127.818,0 128.1,0.282 128.1,53.3 0,53.3

## Keep-outs
Top (LS):
  circle w0.254: c13.97,2.54 r2.5
  circle w0.2: c105.6,24.68 r1.5
  circle w0.2: c123.82,41.04 r1.5
  circle w0.254: c112.76,50.7 r2.5
  circle w0.254: c114.03,2.44 r2.5
  circle w0.254: c96.52,2.54 r2.5
  circle w0.254: c90.17,50.8 r2.5
  circle w0.254: c15.24,50.8 r2.5
  lines w0.1: 31.547,20.975 31.547,15.096 ; 31.882,21.25 31.547,21.25 31.547,15.096 ; 40.057,40.101 38.203,40.101 37.253,41.051 37.253,45.894 37.859,46.5 44.274,46.5 44.577,46.197 44.577,42.888 44.577,41.051 44.577,40.832 43.917,40.172 41.896,40.172 ; 31.547,15.096 31.547,20.97 31.547,15.096 ; 31.547,15.096 38.75,15.096 ; 31.547,15.096 38.75,15.096 ; 31.547,15.096 38.75,15.096 ; 31.547,15.096 38.75,15.096 ; 34.266,21.25 38.75,21.25 ; 34.266,21.25 38.75,21.25 ; 34.266,21.25 38.75,21.25 ; 34.266,21.25 38.75,21.25 ; 38.75,15.096 38.75,20.634 ; 38.75,15.096 38.75,20.634 ; 38.75,15.096 38.75,20.634 ; 38.75,15.096 38.75,20.634 ; 38.75,20.634 38.75,21.25 ; 38.75,20.634 38.75,21.25 ; 38.75,20.634 38.75,21.25 ; 38.75,20.634 38.75,21.25
Mid 1 (LS):
  lines w0.1: 31.882,21.25 31.682,21.05 31.547,21.05 31.547,15.096 38.75,15.096 38.75,20.634 38.75,21.25 34.884,21.25 ; 40.057,40.101 38.203,40.101 37.253,41.051 37.253,45.894 37.717,46.358 44.416,46.358 44.577,46.197 44.577,42.888 44.577,41.051 44.577,40.832 43.917,40.172 41.896,40.172
Mid 2 (GND):
  lines w0.1: 40.057,40.101 38.203,40.101 37.253,41.051 37.253,45.894 37.859,46.5 44.274,46.5 44.577,46.197 44.577,42.888 44.577,41.051 44.577,40.832 43.917,40.172 41.896,40.172 ; 31.547,15.096 31.547,21.25 ; 31.547,15.096 38.75,15.096 ; 31.547,15.096 31.547,21.25 ; 31.547,15.096 38.75,15.096 ; 31.547,15.096 38.75,15.096 ; 31.547,15.096 31.547,21.25 ; 31.547,15.096 31.547,21.25 ; 31.547,15.096 38.75,15.096 ; 31.547,21.25 31.882,21.25 ; 31.547,21.25 31.882,21.25 ; 31.547,21.25 31.882,21.25 ; 31.547,21.25 31.882,21.25 ; 34.266,21.25 38.75,21.25 ; 34.266,21.25 38.75,21.25 ; 34.266,21.25 38.75,21.25 ; 34.266,21.25 38.75,21.25 ; 38.75,15.096 38.75,20.634 ; 38.75,15.096 38.75,20.634 ; 38.75,15.096 38.75,20.634 ; 38.75,15.096 38.75,20.634 ; 38.75,20.634 38.75,21.25 ; 38.75,20.634 38.75,21.25 ; 38.75,20.634 38.75,21.25 ; 38.75,20.634 38.75,21.25
Bottom (HS):
  circle w0.254: c112.76,50.7 r2.5
  circle w0.254: c114.03,2.44 r2.5
  circle w0.254: c96.52,2.54 r2.5
  circle w0.254: c90.17,50.8 r2.5
  circle w0.254: c15.24,50.8 r2.5

## Other copper
Top (LS):
  rectangle net +3V3HUB: 14.605,21.819 19.558,25.432

## Silkscreen, mask and mechanical layers (free items; w line width, h text height)
Top Overlay:
  drawing of 114 lines, arcs and shapes, not listed
  text "RESET" at 3.044,51.842 h1.5
  text "5V" at 98.25,50.789 h1.3
  text "GND" at 25.557,49.691 h1.3 r270
  text "1" at 61.453,48.78 h1.3 r90
  text "4" at 53.793,48.409 h1.3 r90
  text "7" at 46.376,48.361 h1.3 r90
  text "3" at 56.205,48.354 h1.3 r90
  text "9" at 39.657,48.348 h1.3 r90
  text "6" at 48.897,48.348 h1.3 r90
  text "5" at 51.382,48.35 h1.3 r90
  text "2" at 58.836,48.33 h1.3 r90
  text "8" at 42.157,48.258 h1.3 r90
  text "0" at 64.048,48.271 h1.3 r90
  text "11" at 34.723,48.136 h1.3 r90
  text "14" at 69.107,47.765 h1.3 r90
  text "21" at 86.887,47.727 h1.3 r90
  text "22" at 90.483,47.728 h1.3
  text "13" at 29.406,47.71 h1.3 r90
  text "15" at 71.647,47.704 h1.3 r90
  text "16" at 74.187,47.704 h1.3 r90
  text "17" at 76.727,47.717 h1.3 r90
  text "19" at 81.807,47.705 h1.3 r90
  text "12" at 32.029,47.687 h1.3 r90
  text "10" at 37.19,47.627 h1.3 r90
  text "18" at 79.267,47.614 h1.3 r90
  text "20" at 84.347,47.217 h1.3 r90
  text "PWM" at 55.004,46.584 h1
  text "SCL1" at 19.13,46.084 h1 r90
  text "Ljubljana" at 112.863,45.893 h2.5
  text "SDA1" at 21.745,45.717 h1 r90
  text "TX0" at 61.605,45.5 h1 r90
  text "AREF" at 24.277,45.418 h1 r90
  text "24" at 90.483,45.188 h1.3
  text "RX0" at 64,44.889 h1 r90
  text "TX1" at 79.25,44.706 h1 r90
  text "RX1" at 81.79,44.638 h1 r90
  text "SCL" at 86.87,44.427 h1 r90
  text "TX3" at 69.09,44.378 h1 r90
  text "TX2" at 74.17,44.361 h1 r90
  text "RX3" at 71.63,44.31 h1 r90
  text "RX2" at 76.71,44.292 h1 r90
  text "SDA" at 84.319,44.25 h0.9 r90
  text "LCD 8bit" at 47.561,44.047 h1.1
  text "University of  / Faculty of" at 100.864,43.721 h2.5
  text "Electrical Engineering" at 110.175,43.714 h2.5
  text "-" at 5.242,43.152 h2.3
  text "COMMUNICATION" at 77.426,42.926 h0.9
  text "26" at 90.495,42.661 h1.3
  text "MISKO" at 0.654,41.69 h2.55
  text "COM" at 17.5,41.11 h1.1
  text "v 1.1" at 8.999,40.362 h1.1
  text "28" at 90.495,40.121 h1.3
  text "3" at 0.654,37.667 h4.5
  text "30" at 90.496,37.581 h1.3
  text "32" at 90.49,35.035 h1.3
  text "34" at 90.496,32.492 h1.3
  text "36" at 90.503,29.967 h1.3
  text "UL FE LPVO / SLOVENIJA / 8. 12. 2022 /  / DESIGNED BY:" at 1.269,28.051 h1.2
  text "38" at 90.503,27.427 h1.3
  text "40" at 90.471,24.919 h1.3
  text "LIN" at 88.94,22.056 h1.3
  text "Amadej Papez / Tilen Majerle / Matej Antonijevic / Matija Pirc / Matjaz Tome / Marko Jankovec" at 1.189,21.97 h1.2
  text "44" at 90.49,19.795 h1.3
  text "46" at 90.496,17.252 h1.3
  text "48" at 90.503,14.727 h1.3
  text "SWD" at 47.782,12.75 h1.5 r90
  text "50" at 92.311,11.728 h1.3 r90
  text "CAN  / TERM" at 76.313,9.65 h1
  text "52" at 90.503,9.647 h1.3
  text "AREF / VCC" at 71.75,8.487 h1
  text "ANALOG" at 72.206,6.932 h1
  text "CAN" at 87.578,6.331 h1.2
  text "H" at 92.018,5.61 h1.3 r180
  text "L" at 88.393,4.678 h1.3
  text "GND" at 92.75,4.25 h1.3
  text "3V3" at 36.4,4.2 h1 r90
  text "NC" at 28.196,4.1 h1 r90
  text "3V3" at 30.737,4.1 h1 r90
  text "RST" at 33.276,4.1 h1 r90
  text "5V" at 38.463,4.1 h1.3 r90
  text "12V" at 46.083,4.1 h1.3 r90
  text "A0" at 51.073,4.093 h1.1 r90
  text "A1" at 53.613,4.093 h1.1 r90
  text "A2" at 56.153,4.093 h1.1 r90
  text "A3" at 58.693,4.093 h1.1 r90
  text "A4" at 61.226,4.1 h1.1 r90
  text "A5" at 63.766,4.1 h1.1 r90
  text "A6" at 66.306,4.1 h1.1 r90
  text "A7" at 68.846,4.1 h1.1 r90
  text "A8" at 73.904,4.1 h1.1 r90
  text "A9" at 76.444,4.1 h1.1 r90
  text "A10" at 78.948,4.1 h1 r90
  text "A11" at 81.524,4.1 h1.1 r90
  text "DA0" at 84.064,4.1 h1.1 r90
  text "DA1" at 86.604,4.1 h1.1 r90
  text "GND" at 41.597,3.824 h1 r90
  text "GND" at 44.137,3.824 h1 r90
  text "PWR" at 22.082,0.903 h1.2 r90
  text "USB" at 23.587,0.904 h1.2 r90
  text "ERR" at 25.116,0.885 h1.2 r90
Bottom Overlay:
  lines w0.2: 50.632,43.613 51.806,43.613 51.806,13.201 46.38,13.201 46.38,43.613 51.238,43.613
  text "0" at 2.889,51.4 h2
  text "1" at 5.4,51.4 h2
  text "2" at 8.545,51.4 h2
  text "3" at 11.372,51.4 h2
  text "4" at 118.017,51.4 h2
  text "5" at 120.845,51.4 h2
  text "6" at 123.672,51.4 h2
  text "7" at 126.5,51.4 h2
  text "-" at 20.889,47.356 h2.3
  text "-" at 109.202,47.335 h2.3
  text "MISKO" at 27.403,45.287 h3.5
  text "MISKO" at 115.716,45.266 h3.5
  text "37" at 49.45,44.074 h1
  text "3" at 27.822,40.805 h5
  text "3" at 104.43,40.748 h5
  text "LCD" at 67.631,26.381 h3.5
  text "OK" at 15,11.803 h2.3
  text "1" at 49.087,11.754 h1
  text "ESC" at 116.195,5.817 h2.3
Board:
  the board outline again, w0.25
Route Tool Path:
  lines w1: 99.06,11.557 99.06,16.557 ; 99.085,3.454 99.085,8.454 ; 99.085,19.914 99.085,24.914 ; 99.162,28.397 99.162,33.397 ; 99.187,36.83 99.187,41.83 ; 99.187,45.339 99.187,49.5 ; 105.25,17.5 105.25,22.5
Pleksi nosilec (Mech9):
  circle w0.2: c86.366,2.554 r0.7
  circle w0.2: c78.746,2.554 r0.7
  circle w0.2: c91.446,2.554 r0.7
  circle w0.2: c88.906,2.554 r0.7
  circle w0.2: c53.386,50.8 r0.7
  circle w0.2: c50.846,50.8 r0.7
  circle w0.2: c31.554,50.82 r0.7
  circle w0.2: c34.094,50.82 r0.7
  circle w0.2: c36.634,50.82 r0.7
  circle w0.2: c48.306,50.8 r0.7
  circle w0.2: c39.174,50.82 r0.7
  circle w0.2: c41.714,50.82 r0.7
  circle w0.2: c45.766,50.8 r0.7
  circle w0.2: c63.546,50.8 r0.7
  circle w0.2: c73.671,50.8 r0.7
  circle w0.2: c55.926,50.8 r0.7
  circle w0.2: c71.131,50.8 r0.7
  circle w0.2: c58.466,50.8 r0.7
  circle w0.2: c68.591,50.8 r0.7
  circle w0.2: c61.006,50.8 r0.7
  circle w0.2: c76.211,50.8 r0.7
  circle w0.2: c78.751,50.8 r0.7
  circle w0.2: c81.291,50.8 r0.7
  circle w0.2: c83.831,50.8 r0.7
  circle w0.2: c93.952,17.793 r0.7
  circle w0.2: c96.492,17.793 r0.7
  circle w0.2: c93.952,15.253 r0.7
  circle w0.2: c96.492,15.253 r0.7
  circle w0.2: c96.492,12.713 r0.7
  circle w0.2: c93.952,12.713 r0.7
  circle w0.2: c96.492,10.173 r0.7
  circle w0.2: c93.952,7.633 r0.7
  circle w0.2: c96.492,7.633 r0.7
  circle w0.2: c93.952,10.173 r0.7
  circle w0.2: c93.952,20.333 r0.7
  circle w0.2: c93.952,25.413 r0.7
  circle w0.2: c96.492,20.333 r0.7
  circle w0.2: c96.492,22.873 r0.7
  circle w0.2: c96.492,25.413 r0.7
  circle w0.2: c96.492,27.953 r0.7
  circle w0.2: c96.492,33.033 r0.7
  circle w0.2: c96.492,35.573 r0.7
  circle w0.2: c96.492,38.113 r0.7
  circle w0.2: c96.492,40.653 r0.7
  circle w0.2: c96.492,30.493 r0.7
  circle w0.2: c93.952,22.873 r0.7
  circle w0.2: c96.492,45.733 r0.7
  circle w0.2: c96.492,43.193 r0.7
  circle w0.2: c96.492,48.273 r0.7
  circle w0.2: c96.492,50.813 r0.7
  circle w0.2: c27.994,2.554 r0.7
  circle w0.2: c66.068,2.554 r0.7
  circle w0.2: c68.608,2.554 r0.7
  circle w0.2: c55.908,2.554 r0.7
  circle w0.2: c58.448,2.554 r0.7
  circle w0.2: c60.988,2.554 r0.7
  circle w0.2: c30.534,2.554 r0.7
  circle w0.2: c76.206,2.554 r0.7
  circle w0.2: c81.286,2.554 r0.7
  circle w0.2: c83.826,2.554 r0.7
  circle w0.2: c93.952,43.193 r0.7
  circle w0.2: c93.952,48.273 r0.7
  circle w0.2: c93.952,27.953 r0.7
  circle w0.2: c93.952,33.033 r0.7
  circle w0.2: c93.952,35.573 r0.7
  circle w0.2: c93.952,38.113 r0.7
  circle w0.2: c93.952,40.653 r0.7
  circle w0.2: c93.952,30.493 r0.7
  circle w0.2: c93.952,45.733 r0.7
  circle w0.2: c29.014,50.82 r0.7
  circle w0.2: c33.074,2.554 r0.7
  circle w0.2: c63.528,2.554 r0.7
  circle w0.2: c43.234,2.554 r0.7
  circle w0.2: c35.614,2.554 r0.7
  circle w0.2: c38.154,2.554 r0.7
  circle w0.2: c40.694,2.554 r0.7
  circle w0.2: c45.774,2.554 r0.7
  circle w0.2: c73.666,2.554 r0.7
  circle w0.2: c53.368,2.554 r0.7
  circle w0.2: c50.828,2.554 r0.7
  lines w0.2: 26.459,51.52 26.459,53.3 87.17,53.3 87.17,51.5 86.371,51.5 ccw(c86.371,50.8) 86.371,50.1 87.259,50.1 87.259,50.076 ccw(c90.17,50.8) 93.09,50.114 ; 26.46,51.52 cw(c26.474,50.82) 26.468,50.12 ; 26.464,50.12 26.464,0 93.52,0 ; 91.95,0 93.52,0 ; 93.096,50.137 93.096,50.113 93.952,50.113 ccw(c93.952,50.813) 93.952,51.513 93.17,51.513 93.17,53.3 99.187,53.3 99.187,5.54 ; 99.187,6.956 99.187,5.54 ; 93.52,0 93.52,2.54 cw(c96.52,2.54) 96.52,5.54 99.187,5.54 ; 30.149,5.595 30.149,49.457 45.037,49.457 45.037,46.973 55.926,46.973 55.926,5.595 45.037,5.595 30.149,5.595
Top Courtyard:
  lines w0.254: 27,3 105,3 105,51 27,51 27,3

## Dimensions
128.1,0 to 128.1,53.3 on Top Dimensions
0,0 to 128.1,0 on Top Dimensions

## Text inside footprints (layer, text, board x,y; h text height)
J1: Top 3D Body "PCB Edge" at 4.05,-0.1 h0.61